# EAGLE board EasyDriver_GiantPanel_v45 (EAGLE 6.6.0), part 1 of 6
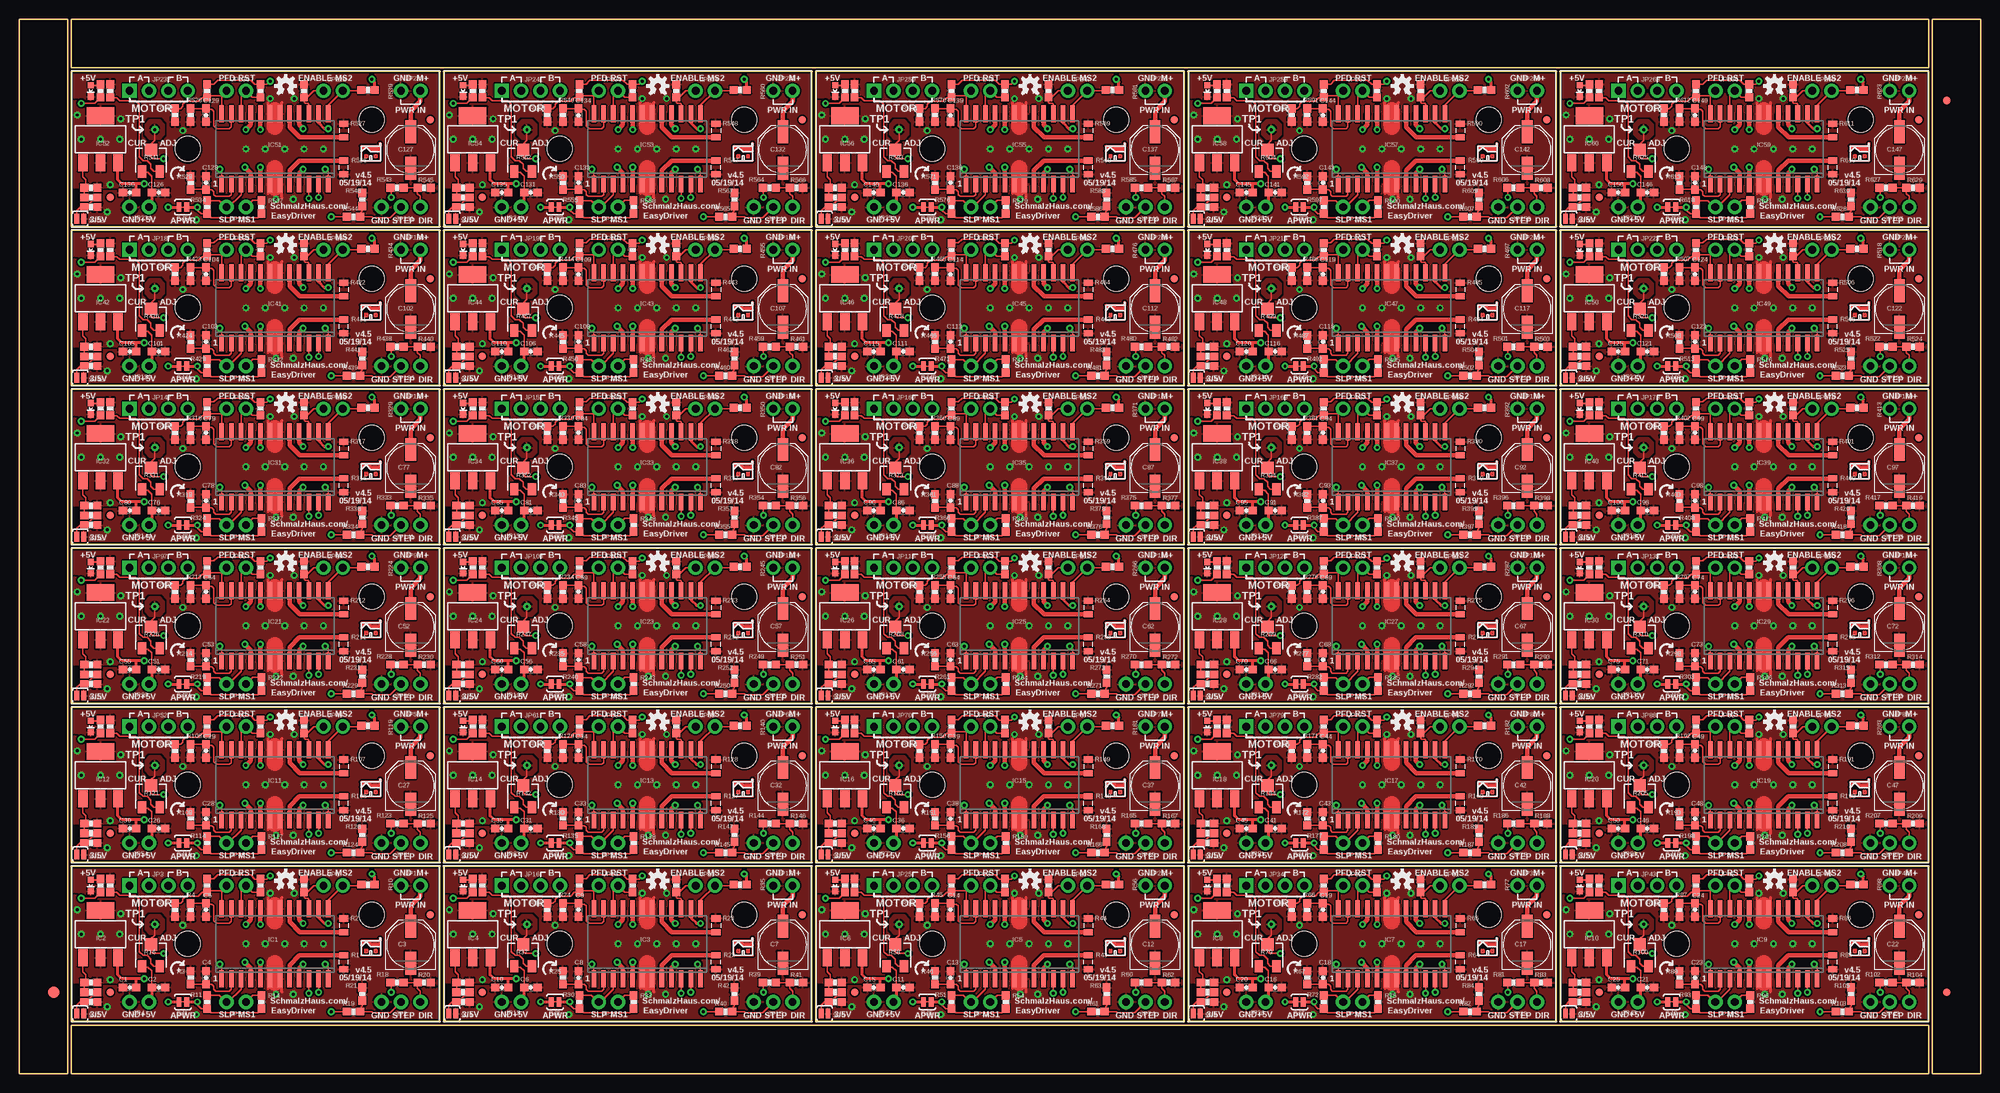
[diagram p0: board, top side]
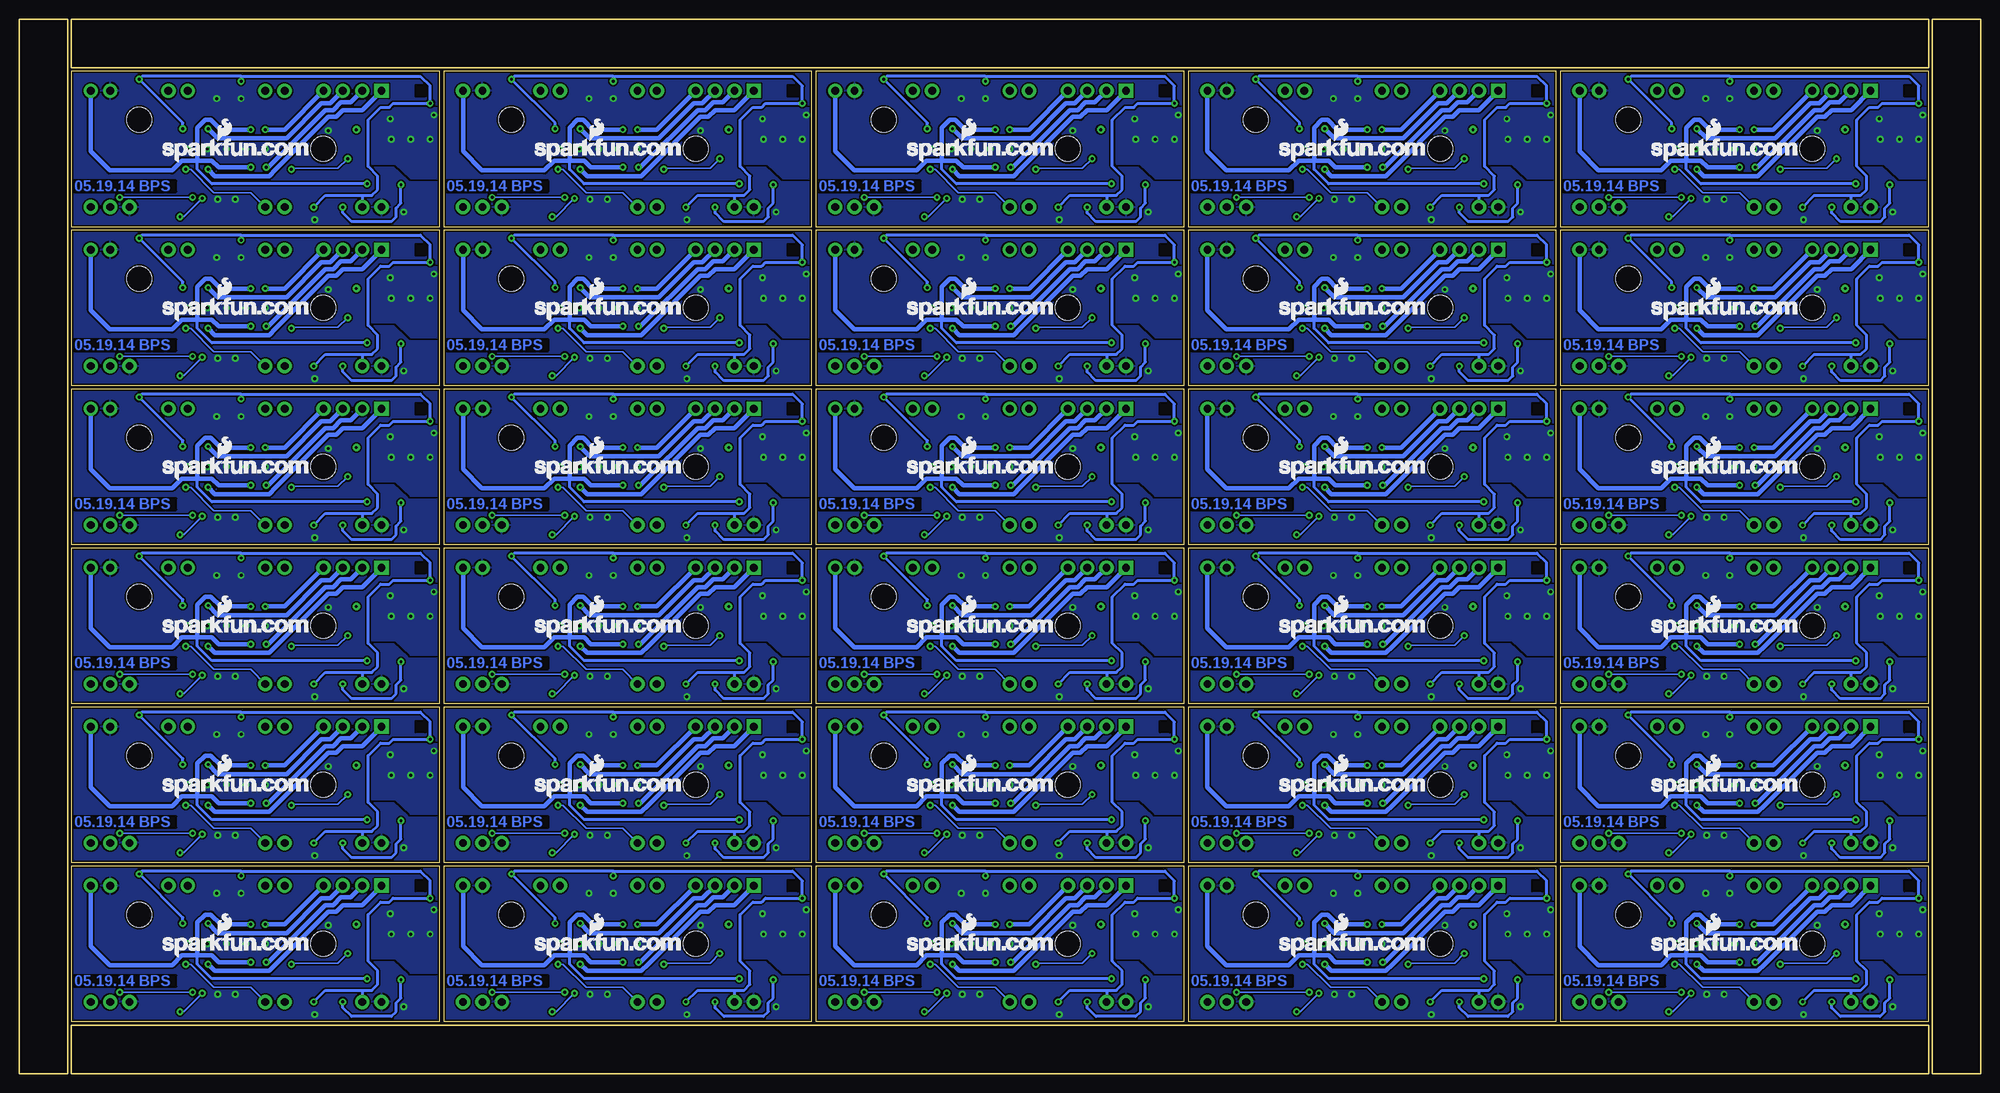
[diagram p1: board, bottom side, seen from below]

Size 257.05 x 138.18 mm. Coordinates in mm from the lower left corner, seen from the top.
Outline: 6.86,6.86 6.86,27.18 55.12,27.18 55.12,6.86 6.86,6.86
Outline: 55.63,6.86 55.63,27.18 103.89,27.18 103.89,6.86 55.63,6.86
Outline: 104.39,6.86 104.39,27.18 152.65,27.18 152.65,6.86 104.39,6.86
Outline: 153.16,6.86 153.16,27.18 201.42,27.18 201.42,6.86 153.16,6.86
Outline: 201.93,6.86 201.93,27.18 250.19,27.18 250.19,6.86 201.93,6.86
Outline: 6.86,27.69 6.86,48.01 55.12,48.01 55.12,27.69 6.86,27.69
Outline: 55.63,27.69 55.63,48.01 103.89,48.01 103.89,27.69 55.63,27.69
Outline: 104.39,27.69 104.39,48.01 152.65,48.01 152.65,27.69 104.39,27.69
Outline: 153.16,27.69 153.16,48.01 201.42,48.01 201.42,27.69 153.16,27.69
Outline: 201.93,27.69 201.93,48.01 250.19,48.01 250.19,27.69 201.93,27.69
Outline: 6.86,48.51 6.86,68.83 55.12,68.83 55.12,48.51 6.86,48.51
Outline: 55.63,48.51 55.63,68.83 103.89,68.83 103.89,48.51 55.63,48.51
Outline: 104.39,48.51 104.39,68.83 152.65,68.83 152.65,48.51 104.39,48.51
Outline: 153.16,48.51 153.16,68.83 201.42,68.83 201.42,48.51 153.16,48.51
Outline: 201.93,48.51 201.93,68.83 250.19,68.83 250.19,48.51 201.93,48.51
Outline: 6.86,69.34 6.86,89.66 55.12,89.66 55.12,69.34 6.86,69.34
Outline: 55.63,69.34 55.63,89.66 103.89,89.66 103.89,69.34 55.63,69.34
Outline: 104.39,69.34 104.39,89.66 152.65,89.66 152.65,69.34 104.39,69.34
Outline: 153.16,69.34 153.16,89.66 201.42,89.66 201.42,69.34 153.16,69.34
Outline: 201.93,69.34 201.93,89.66 250.19,89.66 250.19,69.34 201.93,69.34
Outline: 6.86,90.17 6.86,110.49 55.12,110.49 55.12,90.17 6.86,90.17
Outline: 55.63,90.17 55.63,110.49 103.89,110.49 103.89,90.17 55.63,90.17
Outline: 104.39,90.17 104.39,110.49 152.65,110.49 152.65,90.17 104.39,90.17
Outline: 153.16,90.17 153.16,110.49 201.42,110.49 201.42,90.17 153.16,90.17
Outline: 201.93,90.17 201.93,110.49 250.19,110.49 250.19,90.17 201.93,90.17
Outline: 6.86,111 6.86,131.32 55.12,131.32 55.12,111 6.86,111
Outline: 55.63,111 55.63,131.32 103.89,131.32 103.89,111 55.63,111
Outline: 104.39,111 104.39,131.32 152.65,131.32 152.65,111 104.39,111
Outline: 153.16,111 153.16,131.32 201.42,131.32 201.42,111 153.16,111
Outline: 201.93,111 201.93,131.32 250.19,131.32 250.19,111 201.93,111
Outline: 6.35,0 6.35,138.18 0,138.18 0,0 6.35,0
Outline: 6.86,6.35 6.86,0 250.19,0 250.19,6.35 6.86,6.35
Outline: 257.05,0 257.05,138.18 250.7,138.18 250.7,0 257.05,0
Outline: 250.19,131.83 250.19,138.18 6.86,138.18 6.86,131.83 250.19,131.83
Copper layers (1*16): Top 0.035mm / dielectric 1.5mm / Bottom 0.035mm
Design rules "GoldPhoenix_8and8": minimum track width 7mil, minimum drill 15mil, track to track 8mil, track to pad 8mil, pad to pad 8mil, via to via 8mil, smd to smd 8mil, copper to edge 10mil, drill to drill 8mil, minimum pad ring 12mil, minimum via ring 10mil, stop-mask expansion 4mil, vias tented up to drill 25mil, thermal gap 10mil
bRestrict: area 8.8,23.9 to 10,25.4; area 57.5,23.9 to 58.8,25.4; area 106.3,23.9 to 107.6,25.4; area 155.1,23.9 to 156.3,25.4; area 203.8,23.9 to 205.1,25.4; area 8.8,44.7 to 10,46.2; area 57.5,44.7 to 58.8,46.2; area 106.3,44.7 to 107.6,46.2; area 155.1,44.7 to 156.3,46.2; area 203.8,44.7 to 205.1,46.2; area 8.8,65.5 to 10,67.1; area 57.5,65.5 to 58.8,67.1; area 106.3,65.5 to 107.6,67.1; area 155.1,65.5 to 156.3,67.1; area 203.8,65.5 to 205.1,67.1; area 8.8,86.4 to 10,87.9; area 57.5,86.4 to 58.8,87.9; area 106.3,86.4 to 107.6,87.9; area 155.1,86.4 to 156.3,87.9; area 203.8,86.4 to 205.1,87.9; area 8.8,107.2 to 10,108.7; area 57.5,107.2 to 58.8,108.7; area 106.3,107.2 to 107.6,108.7; area 155.1,107.2 to 156.3,108.7; area 203.8,107.2 to 205.1,108.7; area 8.8,128 to 10,129.5; area 57.5,128 to 58.8,129.5; area 106.3,128 to 107.6,129.5; area 155.1,128 to 156.3,129.5; area 203.8,128 to 205.1,129.5

## Footprints (pad centres in the part's own frame; a part is rotated, then mirrored left to right if it is on the bottom)
0603-CAP = smd 1.1 x 1: 1 -0.85,0; 2 0.85,0
PANASONIC_D = smd 3 x 1.4: + 2.4,0; - -2.4,0
FIDUCIAL-1.5X3 = smd 1.5 x 1.5: 1 0,0
FIDUCIAL-1X2 = smd 1 x 1: 1 0,0
SO24W = smd 0.6 x 2.2: 1 -6.985,-4.6; 2 -5.715,-4.6; 3 -4.445,-4.6; 4 -3.175,-4.6; 5 -1.905,-4.6; 6 -0.635,-4.6; 7 0.635,-4.6; 8 1.905,-4.6; 9 3.175,-4.6; 10 4.445,-4.6; 11 5.715,-4.6; 12 6.985,-4.6; 13 6.985,4.6; 14 5.715,4.6; 15 4.445,4.6; 16 3.175,4.6; 17 1.905,4.6; 18 0.635,4.6; 19 -0.635,4.6; 20 -1.905,4.6; 21 -3.175,4.6; 22 -4.445,4.6; 23 -5.715,4.6; 24 -6.985,4.6
SOT223 = smd 1.219 x 2.235: 1 -2.311,-3.099; 2 0,-3.099; 3 2.311,-3.099 | smd 3.6 x 2.2: 4 0,3.099
1X02_NO_SILK = drill 1.016 pad 1.88: 1 0,0; 2 2.54,0
1X03_NO_SILK = drill 1.016 pad 1.88: 1 0,0; 2 2.54,0; 3 5.08,0
1X04_NO_SILK = drill 1.016 pad 1.88 square: 1 0,0 | drill 1.016 pad 1.88: 2 2.54,0; 3 5.08,0; 4 7.62,0
STAND-OFF = hole 3.302: 0,0
LED-0603 = smd 0.8 x 0.8: A 0,-0.75; C 0,0.75
0805 = smd 0.8 x 1.2: 1 -0.9,0; 2 0.9,0
0603-RES = smd 1.1 x 1: 1 -0.85,0; 2 0.85,0
TRIMPOT-3MM-2 = smd 1.092 x 1.6: 1 -1.155,-1.421; 3 1.155,-1.421 | smd 1.6 x 1.6: 2 0,1.421
SJ_2S-TRACE = smd 0.635 x 1.27: 1 -0.508,0; 2 0.508,0
SJ_2S-NO = smd 0.635 x 1.27: 1 -0.45,0; 2 0.45,0
TP_15TH = drill 0.381 pad 0.61: P$1 0,0

## Placement (x,y rotation side)
C1  .1uF  [0603-CAP]  14.48,11.3 180 top
C2  1uf  [0603-CAP]  18.29,11.3 0 top
C3  47uF  [PANASONIC_D]  51.31,16.89 90 top
C4  680pF  [0603-CAP]  24.51,12.57 90 top
C5  680pF  [0603-CAP]  24.51,21.46 270 top
C6  1uf  [0603-CAP]  67.06,11.3 0 top
C7  47uF  [PANASONIC_D]  100.08,16.89 90 top
C8  680pF  [0603-CAP]  73.28,12.57 90 top
C9  680pF  [0603-CAP]  73.28,21.46 270 top
C10  .1uF  [0603-CAP]  63.25,11.3 180 top
C11  1uf  [0603-CAP]  115.82,11.3 0 top
C12  47uF  [PANASONIC_D]  148.84,16.89 90 top
C13  680pF  [0603-CAP]  122.05,12.57 90 top
C14  680pF  [0603-CAP]  122.05,21.46 270 top
C15  .1uF  [0603-CAP]  112.01,11.3 180 top
C16  1uf  [0603-CAP]  164.59,11.3 0 top
C17  47uF  [PANASONIC_D]  197.61,16.89 90 top
C18  680pF  [0603-CAP]  170.81,12.57 90 top
C19  680pF  [0603-CAP]  170.81,21.46 270 top
C20  .1uF  [0603-CAP]  160.78,11.3 180 top
C21  1uf  [0603-CAP]  213.36,11.3 0 top
C22  47uF  [PANASONIC_D]  246.38,16.89 90 top
C23  680pF  [0603-CAP]  219.58,12.57 90 top
C24  680pF  [0603-CAP]  219.58,21.46 270 top
C25  .1uF  [0603-CAP]  209.55,11.3 180 top
C26  1uf  [0603-CAP]  18.29,32.13 0 top
C27  47uF  [PANASONIC_D]  51.31,37.72 90 top
C28  680pF  [0603-CAP]  24.51,33.4 90 top
C29  680pF  [0603-CAP]  24.51,42.29 270 top
C30  .1uF  [0603-CAP]  14.48,32.13 180 top
C31  1uf  [0603-CAP]  67.06,32.13 0 top
C32  47uF  [PANASONIC_D]  100.08,37.72 90 top
C33  680pF  [0603-CAP]  73.28,33.4 90 top
C34  680pF  [0603-CAP]  73.28,42.29 270 top
C35  .1uF  [0603-CAP]  63.25,32.13 180 top
C36  1uf  [0603-CAP]  115.82,32.13 0 top
C37  47uF  [PANASONIC_D]  148.84,37.72 90 top
C38  680pF  [0603-CAP]  122.05,33.4 90 top
C39  680pF  [0603-CAP]  122.05,42.29 270 top
C40  .1uF  [0603-CAP]  112.01,32.13 180 top
C41  1uf  [0603-CAP]  164.59,32.13 0 top
C42  47uF  [PANASONIC_D]  197.61,37.72 90 top
C43  680pF  [0603-CAP]  170.81,33.4 90 top
C44  680pF  [0603-CAP]  170.81,42.29 270 top
C45  .1uF  [0603-CAP]  160.78,32.13 180 top
C46  1uf  [0603-CAP]  213.36,32.13 0 top
C47  47uF  [PANASONIC_D]  246.38,37.72 90 top
C48  680pF  [0603-CAP]  219.58,33.4 90 top
C49  680pF  [0603-CAP]  219.58,42.29 270 top
C50  .1uF  [0603-CAP]  209.55,32.13 180 top
C51  1uf  [0603-CAP]  18.29,52.96 0 top
C52  47uF  [PANASONIC_D]  51.31,58.55 90 top
C53  680pF  [0603-CAP]  24.51,54.23 90 top
C54  680pF  [0603-CAP]  24.51,63.12 270 top
C55  .1uF  [0603-CAP]  14.48,52.96 180 top
C56  1uf  [0603-CAP]  67.06,52.96 0 top
C57  47uF  [PANASONIC_D]  100.08,58.55 90 top
C58  680pF  [0603-CAP]  73.28,54.23 90 top
C59  680pF  [0603-CAP]  73.28,63.12 270 top
C60  .1uF  [0603-CAP]  63.25,52.96 180 top
C61  1uf  [0603-CAP]  115.82,52.96 0 top
C62  47uF  [PANASONIC_D]  148.84,58.55 90 top
C63  680pF  [0603-CAP]  122.05,54.23 90 top
C64  680pF  [0603-CAP]  122.05,63.12 270 top
C65  .1uF  [0603-CAP]  112.01,52.96 180 top
C66  1uf  [0603-CAP]  164.59,52.96 0 top
C67  47uF  [PANASONIC_D]  197.61,58.55 90 top
C68  680pF  [0603-CAP]  170.81,54.23 90 top
C69  680pF  [0603-CAP]  170.81,63.12 270 top
C70  .1uF  [0603-CAP]  160.78,52.96 180 top
C71  1uf  [0603-CAP]  213.36,52.96 0 top
C72  47uF  [PANASONIC_D]  246.38,58.55 90 top
C73  680pF  [0603-CAP]  219.58,54.23 90 top
C74  680pF  [0603-CAP]  219.58,63.12 270 top
C75  .1uF  [0603-CAP]  209.55,52.96 180 top
C76  1uf  [0603-CAP]  18.29,73.79 0 top
C77  47uF  [PANASONIC_D]  51.31,79.38 90 top
C78  680pF  [0603-CAP]  24.51,75.06 90 top
C79  680pF  [0603-CAP]  24.51,83.95 270 top
C80  .1uF  [0603-CAP]  14.48,73.79 180 top
C81  1uf  [0603-CAP]  67.06,73.79 0 top
C82  47uF  [PANASONIC_D]  100.08,79.38 90 top
C83  680pF  [0603-CAP]  73.28,75.06 90 top
C84  680pF  [0603-CAP]  73.28,83.95 270 top
C85  .1uF  [0603-CAP]  63.25,73.79 180 top
C86  1uf  [0603-CAP]  115.82,73.79 0 top
C87  47uF  [PANASONIC_D]  148.84,79.38 90 top
C88  680pF  [0603-CAP]  122.05,75.06 90 top
C89  680pF  [0603-CAP]  122.05,83.95 270 top
C90  .1uF  [0603-CAP]  112.01,73.79 180 top
C91  1uf  [0603-CAP]  164.59,73.79 0 top
C92  47uF  [PANASONIC_D]  197.61,79.38 90 top
C93  680pF  [0603-CAP]  170.81,75.06 90 top
C94  680pF  [0603-CAP]  170.81,83.95 270 top
C95  .1uF  [0603-CAP]  160.78,73.79 180 top
C96  1uf  [0603-CAP]  213.36,73.79 0 top
C97  47uF  [PANASONIC_D]  246.38,79.38 90 top
C98  680pF  [0603-CAP]  219.58,75.06 90 top
C99  680pF  [0603-CAP]  219.58,83.95 270 top
C100  .1uF  [0603-CAP]  209.55,73.79 180 top
C101  1uf  [0603-CAP]  18.29,94.61 0 top
C102  47uF  [PANASONIC_D]  51.31,100.2 90 top
C103  680pF  [0603-CAP]  24.51,95.89 90 top
C104  680pF  [0603-CAP]  24.51,104.78 270 top
C105  .1uF  [0603-CAP]  14.48,94.61 180 top
C106  1uf  [0603-CAP]  67.06,94.61 0 top
C107  47uF  [PANASONIC_D]  100.08,100.2 90 top
C108  680pF  [0603-CAP]  73.28,95.89 90 top
C109  680pF  [0603-CAP]  73.28,104.78 270 top
C110  .1uF  [0603-CAP]  63.25,94.61 180 top
C111  1uf  [0603-CAP]  115.82,94.61 0 top
C112  47uF  [PANASONIC_D]  148.84,100.2 90 top
C113  680pF  [0603-CAP]  122.05,95.89 90 top
C114  680pF  [0603-CAP]  122.05,104.78 270 top
C115  .1uF  [0603-CAP]  112.01,94.61 180 top
C116  1uf  [0603-CAP]  164.59,94.61 0 top
C117  47uF  [PANASONIC_D]  197.61,100.2 90 top
C118  680pF  [0603-CAP]  170.81,95.89 90 top
C119  680pF  [0603-CAP]  170.81,104.78 270 top
C120  .1uF  [0603-CAP]  160.78,94.61 180 top
C121  1uf  [0603-CAP]  213.36,94.61 0 top
C122  47uF  [PANASONIC_D]  246.38,100.2 90 top
C123  680pF  [0603-CAP]  219.58,95.89 90 top
C124  680pF  [0603-CAP]  219.58,104.78 270 top
C125  .1uF  [0603-CAP]  209.55,94.61 180 top
C126  1uf  [0603-CAP]  18.29,115.44 0 top
C127  47uF  [PANASONIC_D]  51.31,121.03 90 top
C128  680pF  [0603-CAP]  24.51,116.71 90 top
C129  680pF  [0603-CAP]  24.51,125.6 270 top
C130  .1uF  [0603-CAP]  14.48,115.44 180 top
C131  1uf  [0603-CAP]  67.06,115.44 0 top
C132  47uF  [PANASONIC_D]  100.08,121.03 90 top
C133  680pF  [0603-CAP]  73.28,116.71 90 top
C134  680pF  [0603-CAP]  73.28,125.6 270 top
C135  .1uF  [0603-CAP]  63.25,115.44 180 top
C136  1uf  [0603-CAP]  115.82,115.44 0 top
C137  47uF  [PANASONIC_D]  148.84,121.03 90 top
C138  680pF  [0603-CAP]  122.05,116.71 90 top
C139  680pF  [0603-CAP]  122.05,125.6 270 top
C140  .1uF  [0603-CAP]  112.01,115.44 180 top
C141  1uf  [0603-CAP]  164.59,115.44 0 top
C142  47uF  [PANASONIC_D]  197.61,121.03 90 top
C143  680pF  [0603-CAP]  170.81,116.71 90 top
C144  680pF  [0603-CAP]  170.81,125.6 270 top
C145  .1uF  [0603-CAP]  160.78,115.44 180 top
C146  1uf  [0603-CAP]  213.36,115.44 0 top
C147  47uF  [PANASONIC_D]  246.38,121.03 90 top
C148  680pF  [0603-CAP]  219.58,116.71 90 top
C149  680pF  [0603-CAP]  219.58,125.6 270 top
C150  .1uF  [0603-CAP]  209.55,115.44 180 top
E$1  [FIDUCIAL-1.5X3]  4.57,10.67 0 top
E$4  [FIDUCIAL-1X2]  252.6,10.67 0 top
E$6  [FIDUCIAL-1X2]  252.6,127.51 180 top
FID1  FIDUCIAL1X2  [FIDUCIAL-1X2]  53.85,20.83 0 top
FID2  FIDUCIAL1X2  [FIDUCIAL-1X2]  11.94,10.67 0 top
FID3  FIDUCIAL1X2  [FIDUCIAL-1X2]  102.62,20.83 0 top
FID4  FIDUCIAL1X2  [FIDUCIAL-1X2]  60.71,10.67 0 top
FID5  FIDUCIAL1X2  [FIDUCIAL-1X2]  151.38,20.83 0 top
FID6  FIDUCIAL1X2  [FIDUCIAL-1X2]  109.47,10.67 0 top
FID7  FIDUCIAL1X2  [FIDUCIAL-1X2]  200.15,20.83 0 top
FID8  FIDUCIAL1X2  [FIDUCIAL-1X2]  158.24,10.67 0 top
FID9  FIDUCIAL1X2  [FIDUCIAL-1X2]  248.92,20.83 0 top
FID10  FIDUCIAL1X2  [FIDUCIAL-1X2]  207.01,10.67 0 top
FID11  FIDUCIAL1X2  [FIDUCIAL-1X2]  53.85,41.66 0 top
FID12  FIDUCIAL1X2  [FIDUCIAL-1X2]  11.94,31.5 0 top
FID13  FIDUCIAL1X2  [FIDUCIAL-1X2]  102.62,41.66 0 top
FID14  FIDUCIAL1X2  [FIDUCIAL-1X2]  60.71,31.5 0 top
FID15  FIDUCIAL1X2  [FIDUCIAL-1X2]  151.38,41.66 0 top
FID16  FIDUCIAL1X2  [FIDUCIAL-1X2]  109.47,31.5 0 top
FID17  FIDUCIAL1X2  [FIDUCIAL-1X2]  200.15,41.66 0 top
FID18  FIDUCIAL1X2  [FIDUCIAL-1X2]  158.24,31.5 0 top
FID19  FIDUCIAL1X2  [FIDUCIAL-1X2]  248.92,41.66 0 top
FID20  FIDUCIAL1X2  [FIDUCIAL-1X2]  207.01,31.5 0 top
FID21  FIDUCIAL1X2  [FIDUCIAL-1X2]  53.85,62.48 0 top
FID22  FIDUCIAL1X2  [FIDUCIAL-1X2]  11.94,52.32 0 top
FID23  FIDUCIAL1X2  [FIDUCIAL-1X2]  102.62,62.48 0 top
FID24  FIDUCIAL1X2  [FIDUCIAL-1X2]  60.71,52.32 0 top
FID25  FIDUCIAL1X2  [FIDUCIAL-1X2]  151.38,62.48 0 top
FID26  FIDUCIAL1X2  [FIDUCIAL-1X2]  109.47,52.32 0 top
FID27  FIDUCIAL1X2  [FIDUCIAL-1X2]  200.15,62.48 0 top
FID28  FIDUCIAL1X2  [FIDUCIAL-1X2]  158.24,52.32 0 top
FID29  FIDUCIAL1X2  [FIDUCIAL-1X2]  248.92,62.48 0 top
FID30  FIDUCIAL1X2  [FIDUCIAL-1X2]  207.01,52.32 0 top
FID31  FIDUCIAL1X2  [FIDUCIAL-1X2]  53.85,83.31 0 top
FID32  FIDUCIAL1X2  [FIDUCIAL-1X2]  11.94,73.15 0 top
FID33  FIDUCIAL1X2  [FIDUCIAL-1X2]  102.62,83.31 0 top
FID34  FIDUCIAL1X2  [FIDUCIAL-1X2]  60.71,73.15 0 top
FID35  FIDUCIAL1X2  [FIDUCIAL-1X2]  151.38,83.31 0 top
FID36  FIDUCIAL1X2  [FIDUCIAL-1X2]  109.47,73.15 0 top
FID37  FIDUCIAL1X2  [FIDUCIAL-1X2]  200.15,83.31 0 top
FID38  FIDUCIAL1X2  [FIDUCIAL-1X2]  158.24,73.15 0 top
FID39  FIDUCIAL1X2  [FIDUCIAL-1X2]  248.92,83.31 0 top
FID40  FIDUCIAL1X2  [FIDUCIAL-1X2]  207.01,73.15 0 top
FID41  FIDUCIAL1X2  [FIDUCIAL-1X2]  53.85,104.14 0 top
FID42  FIDUCIAL1X2  [FIDUCIAL-1X2]  11.94,93.98 0 top
FID43  FIDUCIAL1X2  [FIDUCIAL-1X2]  102.62,104.14 0 top
FID44  FIDUCIAL1X2  [FIDUCIAL-1X2]  60.71,93.98 0 top
FID45  FIDUCIAL1X2  [FIDUCIAL-1X2]  151.38,104.14 0 top
FID46  FIDUCIAL1X2  [FIDUCIAL-1X2]  109.47,93.98 0 top
FID47  FIDUCIAL1X2  [FIDUCIAL-1X2]  200.15,104.14 0 top
FID48  FIDUCIAL1X2  [FIDUCIAL-1X2]  158.24,93.98 0 top
FID49  FIDUCIAL1X2  [FIDUCIAL-1X2]  248.92,104.14 0 top
FID50  FIDUCIAL1X2  [FIDUCIAL-1X2]  207.01,93.98 0 top
FID51  FIDUCIAL1X2  [FIDUCIAL-1X2]  53.85,124.97 0 top
FID52  FIDUCIAL1X2  [FIDUCIAL-1X2]  11.94,114.81 0 top
FID53  FIDUCIAL1X2  [FIDUCIAL-1X2]  102.62,124.97 0 top
FID54  FIDUCIAL1X2  [FIDUCIAL-1X2]  60.71,114.81 0 top
FID55  FIDUCIAL1X2  [FIDUCIAL-1X2]  151.38,124.97 0 top
FID56  FIDUCIAL1X2  [FIDUCIAL-1X2]  109.47,114.81 0 top
FID57  FIDUCIAL1X2  [FIDUCIAL-1X2]  200.15,124.97 0 top
FID58  FIDUCIAL1X2  [FIDUCIAL-1X2]  158.24,114.81 0 top
FID59  FIDUCIAL1X2  [FIDUCIAL-1X2]  248.92,124.97 0 top
FID60  FIDUCIAL1X2  [FIDUCIAL-1X2]  207.01,114.81 0 top
IC1  A3967SLB  [SO24W]  33.53,17.02 0 top
IC2  V_REG_317SMD  [SOT223]  10.67,18.29 0 top
IC3  A3967SLB  [SO24W]  82.3,17.02 0 top
IC4  V_REG_317SMD  [SOT223]  59.44,18.29 0 top
IC5  A3967SLB  [SO24W]  131.06,17.02 0 top
IC6  V_REG_317SMD  [SOT223]  108.2,18.29 0 top
IC7  A3967SLB  [SO24W]  179.83,17.02 0 top
IC8  V_REG_317SMD  [SOT223]  156.97,18.29 0 top
IC9  A3967SLB  [SO24W]  228.6,17.02 0 top
IC10  V_REG_317SMD  [SOT223]  205.74,18.29 0 top
IC11  A3967SLB  [SO24W]  33.53,37.85 0 top
IC12  V_REG_317SMD  [SOT223]  10.67,39.12 0 top
IC13  A3967SLB  [SO24W]  82.3,37.85 0 top
IC14  V_REG_317SMD  [SOT223]  59.44,39.12 0 top
IC15  A3967SLB  [SO24W]  131.06,37.85 0 top
IC16  V_REG_317SMD  [SOT223]  108.2,39.12 0 top
IC17  A3967SLB  [SO24W]  179.83,37.85 0 top
IC18  V_REG_317SMD  [SOT223]  156.97,39.12 0 top
IC19  A3967SLB  [SO24W]  228.6,37.85 0 top
IC20  V_REG_317SMD  [SOT223]  205.74,39.12 0 top
IC21  A3967SLB  [SO24W]  33.53,58.67 0 top
IC22  V_REG_317SMD  [SOT223]  10.67,59.94 0 top
IC23  A3967SLB  [SO24W]  82.3,58.67 0 top
IC24  V_REG_317SMD  [SOT223]  59.44,59.94 0 top
IC25  A3967SLB  [SO24W]  131.06,58.67 0 top
IC26  V_REG_317SMD  [SOT223]  108.2,59.94 0 top
IC27  A3967SLB  [SO24W]  179.83,58.67 0 top
IC28  V_REG_317SMD  [SOT223]  156.97,59.94 0 top
IC29  A3967SLB  [SO24W]  228.6,58.67 0 top
IC30  V_REG_317SMD  [SOT223]  205.74,59.94 0 top
IC31  A3967SLB  [SO24W]  33.53,79.5 0 top
IC32  V_REG_317SMD  [SOT223]  10.67,80.77 0 top
IC33  A3967SLB  [SO24W]  82.3,79.5 0 top
IC34  V_REG_317SMD  [SOT223]  59.44,80.77 0 top
IC35  A3967SLB  [SO24W]  131.06,79.5 0 top
IC36  V_REG_317SMD  [SOT223]  108.2,80.77 0 top
IC37  A3967SLB  [SO24W]  179.83,79.5 0 top
IC38  V_REG_317SMD  [SOT223]  156.97,80.77 0 top
IC39  A3967SLB  [SO24W]  228.6,79.5 0 top
IC40  V_REG_317SMD  [SOT223]  205.74,80.77 0 top
IC41  A3967SLB  [SO24W]  33.53,100.33 0 top
IC42  V_REG_317SMD  [SOT223]  10.67,101.6 0 top
IC43  A3967SLB  [SO24W]  82.3,100.33 0 top
IC44  V_REG_317SMD  [SOT223]  59.44,101.6 0 top
IC45  A3967SLB  [SO24W]  131.06,100.33 0 top
IC46  V_REG_317SMD  [SOT223]  108.2,101.6 0 top
IC47  A3967SLB  [SO24W]  179.83,100.33 0 top
IC48  V_REG_317SMD  [SOT223]  156.97,101.6 0 top
IC49  A3967SLB  [SO24W]  228.6,100.33 0 top
IC50  V_REG_317SMD  [SOT223]  205.74,101.6 0 top
IC51  A3967SLB  [SO24W]  33.53,121.16 0 top
IC52  V_REG_317SMD  [SOT223]  10.67,122.43 0 top
IC53  A3967SLB  [SO24W]  82.3,121.16 0 top
IC54  V_REG_317SMD  [SOT223]  59.44,122.43 0 top
IC55  A3967SLB  [SO24W]  131.06,121.16 0 top
IC56  V_REG_317SMD  [SOT223]  108.2,122.43 0 top
IC57  A3967SLB  [SO24W]  179.83,121.16 0 top
IC58  V_REG_317SMD  [SOT223]  156.97,122.43 0 top
IC59  A3967SLB  [SO24W]  228.6,121.16 0 top
IC60  V_REG_317SMD  [SOT223]  205.74,122.43 0 top
JP1  [1X02_NO_SILK]  50.04,24.64 0 top
JP2  [1X03_NO_SILK]  47.5,9.4 0 top
JP3  [1X04_NO_SILK]  14.48,24.64 0 top
JP4  [1X02_NO_SILK]  17.02,9.4 180 top
JP5  [1X02_NO_SILK]  29.72,9.4 180 top
JP6  [1X02_NO_SILK]  39.88,24.64 0 top
JP7  [1X02_NO_SILK]  27.18,24.64 0 top
JP8  STAND-OFF  [STAND-OFF]  46.23,20.83 0 top
JP9  STAND-OFF  [STAND-OFF]  22.1,17.02 0 top
JP10  STAND-OFF  [STAND-OFF]  95,20.83 0 top
JP11  STAND-OFF  [STAND-OFF]  70.87,17.02 0 top
JP12  [1X02_NO_SILK]  78.49,9.4 180 top
JP13  [1X02_NO_SILK]  88.65,24.64 0 top
JP14  [1X02_NO_SILK]  75.95,24.64 0 top
JP15  [1X03_NO_SILK]  96.27,9.4 0 top
JP16  [1X04_NO_SILK]  63.25,24.64 0 top
JP17  [1X02_NO_SILK]  98.81,24.64 0 top
JP18  [1X02_NO_SILK]  65.79,9.4 180 top
JP19  STAND-OFF  [STAND-OFF]  143.76,20.83 0 top
JP20  STAND-OFF  [STAND-OFF]  119.63,17.02 0 top
JP21  [1X02_NO_SILK]  127.25,9.4 180 top
JP22  [1X02_NO_SILK]  137.41,24.64 0 top
JP23  [1X02_NO_SILK]  124.71,24.64 0 top
JP24  [1X03_NO_SILK]  145.03,9.4 0 top
JP25  [1X04_NO_SILK]  112.01,24.64 0 top
JP26  [1X02_NO_SILK]  147.57,24.64 0 top
JP27  [1X02_NO_SILK]  114.55,9.4 180 top
JP28  STAND-OFF  [STAND-OFF]  192.53,20.83 0 top
JP29  STAND-OFF  [STAND-OFF]  168.4,17.02 0 top
JP30  [1X02_NO_SILK]  176.02,9.4 180 top
JP31  [1X02_NO_SILK]  186.18,24.64 0 top
JP32  [1X02_NO_SILK]  173.48,24.64 0 top
JP33  [1X03_NO_SILK]  193.8,9.4 0 top
JP34  [1X04_NO_SILK]  160.78,24.64 0 top
JP35  [1X02_NO_SILK]  196.34,24.64 0 top
JP36  [1X02_NO_SILK]  163.32,9.4 180 top
JP37  STAND-OFF  [STAND-OFF]  241.3,20.83 0 top
JP38  STAND-OFF  [STAND-OFF]  217.17,17.02 0 top
JP39  [1X02_NO_SILK]  224.79,9.4 180 top
JP40  [1X02_NO_SILK]  234.95,24.64 0 top
JP41  [1X02_NO_SILK]  222.25,24.64 0 top
JP42  [1X03_NO_SILK]  242.57,9.4 0 top
JP43  [1X04_NO_SILK]  209.55,24.64 0 top
JP44  [1X02_NO_SILK]  245.11,24.64 0 top
JP45  [1X02_NO_SILK]  212.09,9.4 180 top
JP46  STAND-OFF  [STAND-OFF]  46.23,41.66 0 top
JP47  STAND-OFF  [STAND-OFF]  22.1,37.85 0 top
JP48  [1X02_NO_SILK]  29.72,30.23 180 top
JP49  [1X02_NO_SILK]  39.88,45.47 0 top
JP50  [1X02_NO_SILK]  27.18,45.47 0 top
JP51  [1X03_NO_SILK]  47.5,30.23 0 top
JP52  [1X04_NO_SILK]  14.48,45.47 0 top
JP53  [1X02_NO_SILK]  50.04,45.47 0 top
JP54  [1X02_NO_SILK]  17.02,30.23 180 top
JP55  STAND-OFF  [STAND-OFF]  95,41.66 0 top
JP56  STAND-OFF  [STAND-OFF]  70.87,37.85 0 top
JP57  [1X02_NO_SILK]  78.49,30.23 180 top
JP58  [1X02_NO_SILK]  88.65,45.47 0 top
JP59  [1X02_NO_SILK]  75.95,45.47 0 top
JP60  [1X03_NO_SILK]  96.27,30.23 0 top
JP61  [1X04_NO_SILK]  63.25,45.47 0 top
JP62  [1X02_NO_SILK]  98.81,45.47 0 top
JP63  [1X02_NO_SILK]  65.79,30.23 180 top
JP64  STAND-OFF  [STAND-OFF]  143.76,41.66 0 top
JP65  STAND-OFF  [STAND-OFF]  119.63,37.85 0 top
JP66  [1X02_NO_SILK]  127.25,30.23 180 top
JP67  [1X02_NO_SILK]  137.41,45.47 0 top
JP68  [1X02_NO_SILK]  124.71,45.47 0 top
JP69  [1X03_NO_SILK]  145.03,30.23 0 top
JP70  [1X04_NO_SILK]  112.01,45.47 0 top
JP71  [1X02_NO_SILK]  147.57,45.47 0 top
JP72  [1X02_NO_SILK]  114.55,30.23 180 top
JP73  STAND-OFF  [STAND-OFF]  192.53,41.66 0 top
JP74  STAND-OFF  [STAND-OFF]  168.4,37.85 0 top
JP75  [1X02_NO_SILK]  176.02,30.23 180 top
JP76  [1X02_NO_SILK]  186.18,45.47 0 top
JP77  [1X02_NO_SILK]  173.48,45.47 0 top
JP78  [1X03_NO_SILK]  193.8,30.23 0 top
JP79  [1X04_NO_SILK]  160.78,45.47 0 top
JP80  [1X02_NO_SILK]  196.34,45.47 0 top
JP81  [1X02_NO_SILK]  163.32,30.23 180 top
JP82  STAND-OFF  [STAND-OFF]  241.3,41.66 0 top
JP83  STAND-OFF  [STAND-OFF]  217.17,37.85 0 top
JP84  [1X02_NO_SILK]  224.79,30.23 180 top
JP85  [1X02_NO_SILK]  234.95,45.47 0 top
JP86  [1X02_NO_SILK]  222.25,45.47 0 top
JP87  [1X03_NO_SILK]  242.57,30.23 0 top
JP88  [1X04_NO_SILK]  209.55,45.47 0 top
JP89  [1X02_NO_SILK]  245.11,45.47 0 top
JP90  [1X02_NO_SILK]  212.09,30.23 180 top
JP91  STAND-OFF  [STAND-OFF]  46.23,62.48 0 top
JP92  STAND-OFF  [STAND-OFF]  22.1,58.67 0 top
JP93  [1X02_NO_SILK]  29.72,51.05 180 top
JP94  [1X02_NO_SILK]  39.88,66.29 0 top
JP95  [1X02_NO_SILK]  27.18,66.29 0 top
JP96  [1X03_NO_SILK]  47.5,51.05 0 top
JP97  [1X04_NO_SILK]  14.48,66.29 0 top
JP98  [1X02_NO_SILK]  50.04,66.29 0 top
JP99  [1X02_NO_SILK]  17.02,51.05 180 top
JP100  STAND-OFF  [STAND-OFF]  95,62.48 0 top
JP101  STAND-OFF  [STAND-OFF]  70.87,58.67 0 top
JP102  [1X02_NO_SILK]  78.49,51.05 180 top
JP103  [1X02_NO_SILK]  88.65,66.29 0 top
JP104  [1X02_NO_SILK]  75.95,66.29 0 top
JP105  [1X03_NO_SILK]  96.27,51.05 0 top
JP106  [1X04_NO_SILK]  63.25,66.29 0 top
JP107  [1X02_NO_SILK]  98.81,66.29 0 top
JP108  [1X02_NO_SILK]  65.79,51.05 180 top
JP109  STAND-OFF  [STAND-OFF]  143.76,62.48 0 top
JP110  STAND-OFF  [STAND-OFF]  119.63,58.67 0 top
JP111  [1X02_NO_SILK]  127.25,51.05 180 top
JP112  [1X02_NO_SILK]  137.41,66.29 0 top
JP113  [1X02_NO_SILK]  124.71,66.29 0 top
JP114  [1X03_NO_SILK]  145.03,51.05 0 top
JP115  [1X04_NO_SILK]  112.01,66.29 0 top
JP116  [1X02_NO_SILK]  147.57,66.29 0 top
JP117  [1X02_NO_SILK]  114.55,51.05 180 top
JP118  STAND-OFF  [STAND-OFF]  192.53,62.48 0 top
JP119  STAND-OFF  [STAND-OFF]  168.4,58.67 0 top
JP120  [1X02_NO_SILK]  176.02,51.05 180 top
JP121  [1X02_NO_SILK]  186.18,66.29 0 top
JP122  [1X02_NO_SILK]  173.48,66.29 0 top
JP123  [1X03_NO_SILK]  193.8,51.05 0 top
JP124  [1X04_NO_SILK]  160.78,66.29 0 top
JP125  [1X02_NO_SILK]  196.34,66.29 0 top
JP126  [1X02_NO_SILK]  163.32,51.05 180 top
JP127  STAND-OFF  [STAND-OFF]  241.3,62.48 0 top
JP128  STAND-OFF  [STAND-OFF]  217.17,58.67 0 top
JP129  [1X02_NO_SILK]  224.79,51.05 180 top
JP130  [1X02_NO_SILK]  234.95,66.29 0 top
JP131  [1X02_NO_SILK]  222.25,66.29 0 top
JP132  [1X03_NO_SILK]  242.57,51.05 0 top
JP133  [1X04_NO_SILK]  209.55,66.29 0 top
JP134  [1X02_NO_SILK]  245.11,66.29 0 top
JP135  [1X02_NO_SILK]  212.09,51.05 180 top
JP136  STAND-OFF  [STAND-OFF]  46.23,83.31 0 top
JP137  STAND-OFF  [STAND-OFF]  22.1,79.5 0 top
JP138  [1X02_NO_SILK]  29.72,71.88 180 top
JP139  [1X02_NO_SILK]  39.88,87.12 0 top
JP140  [1X02_NO_SILK]  27.18,87.12 0 top
JP141  [1X03_NO_SILK]  47.5,71.88 0 top
JP142  [1X04_NO_SILK]  14.48,87.12 0 top
JP143  [1X02_NO_SILK]  50.04,87.12 0 top
JP144  [1X02_NO_SILK]  17.02,71.88 180 top
JP145  STAND-OFF  [STAND-OFF]  95,83.31 0 top
JP146  STAND-OFF  [STAND-OFF]  70.87,79.5 0 top
JP147  [1X02_NO_SILK]  78.49,71.88 180 top
JP148  [1X02_NO_SILK]  88.65,87.12 0 top
JP149  [1X02_NO_SILK]  75.95,87.12 0 top
JP150  [1X03_NO_SILK]  96.27,71.88 0 top
JP151  [1X04_NO_SILK]  63.25,87.12 0 top
JP152  [1X02_NO_SILK]  98.81,87.12 0 top
JP153  [1X02_NO_SILK]  65.79,71.88 180 top
JP154  STAND-OFF  [STAND-OFF]  143.76,83.31 0 top
JP155  STAND-OFF  [STAND-OFF]  119.63,79.5 0 top
JP156  [1X02_NO_SILK]  127.25,71.88 180 top
JP157  [1X02_NO_SILK]  137.41,87.12 0 top
JP158  [1X02_NO_SILK]  124.71,87.12 0 top
JP159  [1X03_NO_SILK]  145.03,71.88 0 top
JP160  [1X04_NO_SILK]  112.01,87.12 0 top
JP161  [1X02_NO_SILK]  147.57,87.12 0 top
JP162  [1X02_NO_SILK]  114.55,71.88 180 top
JP163  STAND-OFF  [STAND-OFF]  192.53,83.31 0 top
JP164  STAND-OFF  [STAND-OFF]  168.4,79.5 0 top
JP165  [1X02_NO_SILK]  176.02,71.88 180 top
JP166  [1X02_NO_SILK]  186.18,87.12 0 top
JP167  [1X02_NO_SILK]  173.48,87.12 0 top
JP168  [1X03_NO_SILK]  193.8,71.88 0 top
JP169  [1X04_NO_SILK]  160.78,87.12 0 top
JP170  [1X02_NO_SILK]  196.34,87.12 0 top
JP171  [1X02_NO_SILK]  163.32,71.88 180 top
JP172  STAND-OFF  [STAND-OFF]  241.3,83.31 0 top
JP173  STAND-OFF  [STAND-OFF]  217.17,79.5 0 top
JP174  [1X02_NO_SILK]  224.79,71.88 180 top
JP175  [1X02_NO_SILK]  234.95,87.12 0 top
JP176  [1X02_NO_SILK]  222.25,87.12 0 top
JP177  [1X03_NO_SILK]  242.57,71.88 0 top
JP178  [1X04_NO_SILK]  209.55,87.12 0 top
JP179  [1X02_NO_SILK]  245.11,87.12 0 top
JP180  [1X02_NO_SILK]  212.09,71.88 180 top
JP181  STAND-OFF  [STAND-OFF]  46.23,104.14 0 top
JP182  STAND-OFF  [STAND-OFF]  22.1,100.33 0 top
JP183  [1X02_NO_SILK]  29.72,92.71 180 top
JP184  [1X02_NO_SILK]  39.88,107.95 0 top
JP185  [1X02_NO_SILK]  27.18,107.95 0 top
JP186  [1X03_NO_SILK]  47.5,92.71 0 top
JP187  [1X04_NO_SILK]  14.48,107.95 0 top
JP188  [1X02_NO_SILK]  50.04,107.95 0 top
JP189  [1X02_NO_SILK]  17.02,92.71 180 top
JP190  STAND-OFF  [STAND-OFF]  95,104.14 0 top
JP191  STAND-OFF  [STAND-OFF]  70.87,100.33 0 top
JP192  [1X02_NO_SILK]  78.49,92.71 180 top
JP193  [1X02_NO_SILK]  88.65,107.95 0 top
JP194  [1X02_NO_SILK]  75.95,107.95 0 top
JP195  [1X03_NO_SILK]  96.27,92.71 0 top
JP196  [1X04_NO_SILK]  63.25,107.95 0 top
JP197  [1X02_NO_SILK]  98.81,107.95 0 top
JP198  [1X02_NO_SILK]  65.79,92.71 180 top
JP199  STAND-OFF  [STAND-OFF]  143.76,104.14 0 top
JP200  STAND-OFF  [STAND-OFF]  119.63,100.33 0 top
JP201  [1X02_NO_SILK]  127.25,92.71 180 top
JP202  [1X02_NO_SILK]  137.41,107.95 0 top
JP203  [1X02_NO_SILK]  124.71,107.95 0 top
JP204  [1X03_NO_SILK]  145.03,92.71 0 top
JP205  [1X04_NO_SILK]  112.01,107.95 0 top
JP206  [1X02_NO_SILK]  147.57,107.95 0 top
JP207  [1X02_NO_SILK]  114.55,92.71 180 top
JP208  STAND-OFF  [STAND-OFF]  192.53,104.14 0 top
JP209  STAND-OFF  [STAND-OFF]  168.4,100.33 0 top
JP210  [1X02_NO_SILK]  176.02,92.71 180 top
JP211  [1X02_NO_SILK]  186.18,107.95 0 top
JP212  [1X02_NO_SILK]  173.48,107.95 0 top
JP213  [1X03_NO_SILK]  193.8,92.71 0 top
JP214  [1X04_NO_SILK]  160.78,107.95 0 top
JP215  [1X02_NO_SILK]  196.34,107.95 0 top
JP216  [1X02_NO_SILK]  163.32,92.71 180 top
JP217  STAND-OFF  [STAND-OFF]  241.3,104.14 0 top
JP218  STAND-OFF  [STAND-OFF]  217.17,100.33 0 top
JP219  [1X02_NO_SILK]  224.79,92.71 180 top
JP220  [1X02_NO_SILK]  234.95,107.95 0 top
JP221  [1X02_NO_SILK]  222.25,107.95 0 top
JP222  [1X03_NO_SILK]  242.57,92.71 0 top
JP223  [1X04_NO_SILK]  209.55,107.95 0 top
JP224  [1X02_NO_SILK]  245.11,107.95 0 top
JP225  [1X02_NO_SILK]  212.09,92.71 180 top
JP226  STAND-OFF  [STAND-OFF]  46.23,124.97 0 top
JP227  STAND-OFF  [STAND-OFF]  22.1,121.16 0 top
JP228  [1X02_NO_SILK]  29.72,113.54 180 top
JP229  [1X02_NO_SILK]  39.88,128.78 0 top
JP230  [1X02_NO_SILK]  27.18,128.78 0 top
JP231  [1X03_NO_SILK]  47.5,113.54 0 top
JP232  [1X04_NO_SILK]  14.48,128.78 0 top
JP233  [1X02_NO_SILK]  50.04,128.78 0 top
JP234  [1X02_NO_SILK]  17.02,113.54 180 top
JP235  STAND-OFF  [STAND-OFF]  95,124.97 0 top
JP236  STAND-OFF  [STAND-OFF]  70.87,121.16 0 top
JP237  [1X02_NO_SILK]  78.49,113.54 180 top
JP238  [1X02_NO_SILK]  88.65,128.78 0 top
JP239  [1X02_NO_SILK]  75.95,128.78 0 top
JP240  [1X03_NO_SILK]  96.27,113.54 0 top
JP241  [1X04_NO_SILK]  63.25,128.78 0 top
JP242  [1X02_NO_SILK]  98.81,128.78 0 top
JP243  [1X02_NO_SILK]  65.79,113.54 180 top
JP244  STAND-OFF  [STAND-OFF]  143.76,124.97 0 top
JP245  STAND-OFF  [STAND-OFF]  119.63,121.16 0 top
JP246  [1X02_NO_SILK]  127.25,113.54 180 top
JP247  [1X02_NO_SILK]  137.41,128.78 0 top
JP248  [1X02_NO_SILK]  124.71,128.78 0 top
JP249  [1X03_NO_SILK]  145.03,113.54 0 top
JP250  [1X04_NO_SILK]  112.01,128.78 0 top
JP251  [1X02_NO_SILK]  147.57,128.78 0 top
JP252  [1X02_NO_SILK]  114.55,113.54 180 top
JP253  STAND-OFF  [STAND-OFF]  192.53,124.97 0 top
JP254  STAND-OFF  [STAND-OFF]  168.4,121.16 0 top
JP255  [1X02_NO_SILK]  176.02,113.54 180 top
JP256  [1X02_NO_SILK]  186.18,128.78 0 top
JP257  [1X02_NO_SILK]  173.48,128.78 0 top
JP258  [1X03_NO_SILK]  193.8,113.54 0 top
JP259  [1X04_NO_SILK]  160.78,128.78 0 top
JP260  [1X02_NO_SILK]  196.34,128.78 0 top
JP261  [1X02_NO_SILK]  163.32,113.54 180 top
JP262  STAND-OFF  [STAND-OFF]  241.3,124.97 0 top
JP263  STAND-OFF  [STAND-OFF]  217.17,121.16 0 top
JP264  [1X02_NO_SILK]  224.79,113.54 180 top
JP265  [1X02_NO_SILK]  234.95,128.78 0 top
JP266  [1X02_NO_SILK]  222.25,128.78 0 top
JP267  [1X03_NO_SILK]  242.57,113.54 0 top
JP268  [1X04_NO_SILK]  209.55,128.78 0 top
JP269  [1X02_NO_SILK]  245.11,128.78 0 top
JP270  [1X02_NO_SILK]  212.09,113.54 180 top
LOGO1  OSHW-LOGOS  [OSHW-LOGO-S]  34.92,25.27 0 top
LOGO2  OSHW-LOGOS  [OSHW-LOGO-S]  83.69,25.27 0 top
LOGO3  OSHW-LOGOS  [OSHW-LOGO-S]  132.46,25.27 0 top
LOGO4  OSHW-LOGOS  [OSHW-LOGO-S]  181.23,25.27 0 top
LOGO5  OSHW-LOGOS  [OSHW-LOGO-S]  230,25.27 0 top
LOGO6  OSHW-LOGOS  [OSHW-LOGO-S]  34.92,46.1 0 top
LOGO7  OSHW-LOGOS  [OSHW-LOGO-S]  83.69,46.1 0 top
LOGO8  OSHW-LOGOS  [OSHW-LOGO-S]  132.46,46.1 0 top
LOGO9  OSHW-LOGOS  [OSHW-LOGO-S]  181.23,46.1 0 top
LOGO10  OSHW-LOGOS  [OSHW-LOGO-S]  230,46.1 0 top
LOGO11  OSHW-LOGOS  [OSHW-LOGO-S]  34.92,66.93 0 top
LOGO12  OSHW-LOGOS  [OSHW-LOGO-S]  83.69,66.93 0 top
LOGO13  OSHW-LOGOS  [OSHW-LOGO-S]  132.46,66.93 0 top
LOGO14  OSHW-LOGOS  [OSHW-LOGO-S]  181.23,66.93 0 top
LOGO15  OSHW-LOGOS  [OSHW-LOGO-S]  230,66.93 0 top
LOGO16  OSHW-LOGOS  [OSHW-LOGO-S]  34.92,87.76 0 top
LOGO17  OSHW-LOGOS  [OSHW-LOGO-S]  83.69,87.76 0 top
LOGO18  OSHW-LOGOS  [OSHW-LOGO-S]  132.46,87.76 0 top
LOGO19  OSHW-LOGOS  [OSHW-LOGO-S]  181.23,87.76 0 top
LOGO20  OSHW-LOGOS  [OSHW-LOGO-S]  230,87.76 0 top
LOGO21  OSHW-LOGOS  [OSHW-LOGO-S]  34.92,108.58 0 top
LOGO22  OSHW-LOGOS  [OSHW-LOGO-S]  83.69,108.58 0 top
LOGO23  OSHW-LOGOS  [OSHW-LOGO-S]  132.46,108.58 0 top
LOGO24  OSHW-LOGOS  [OSHW-LOGO-S]  181.23,108.58 0 top
LOGO25  OSHW-LOGOS  [OSHW-LOGO-S]  230,108.58 0 top
LOGO26  OSHW-LOGOS  [OSHW-LOGO-S]  34.92,129.41 0 top
LOGO27  OSHW-LOGOS  [OSHW-LOGO-S]  83.69,129.41 0 top
LOGO28  OSHW-LOGOS  [OSHW-LOGO-S]  132.46,129.41 0 top
LOGO29  OSHW-LOGOS  [OSHW-LOGO-S]  181.23,129.41 0 top
LOGO30  OSHW-LOGOS  [OSHW-LOGO-S]  230,129.41 0 top
PWR_LED  YELLOW  [LED-0603]  9.4,24.64 180 top
PWR_LED1  YELLOW  [LED-0603]  58.17,24.64 180 top
PWR_LED2  YELLOW  [LED-0603]  106.93,24.64 180 top
PWR_LED3  YELLOW  [LED-0603]  155.7,24.64 180 top
PWR_LED4  YELLOW  [LED-0603]  204.47,24.64 180 top
PWR_LED5  YELLOW  [LED-0603]  9.4,45.47 180 top
PWR_LED6  YELLOW  [LED-0603]  58.17,45.47 180 top
PWR_LED7  YELLOW  [LED-0603]  106.93,45.47 180 top
PWR_LED8  YELLOW  [LED-0603]  155.7,45.47 180 top
PWR_LED9  YELLOW  [LED-0603]  204.47,45.47 180 top
PWR_LED10  YELLOW  [LED-0603]  9.4,66.29 180 top
PWR_LED11  YELLOW  [LED-0603]  58.17,66.29 180 top
PWR_LED12  YELLOW  [LED-0603]  106.93,66.29 180 top
PWR_LED13  YELLOW  [LED-0603]  155.7,66.29 180 top
PWR_LED14  YELLOW  [LED-0603]  204.47,66.29 180 top
PWR_LED15  YELLOW  [LED-0603]  9.4,87.12 180 top
PWR_LED16  YELLOW  [LED-0603]  58.17,87.12 180 top
PWR_LED17  YELLOW  [LED-0603]  106.93,87.12 180 top
PWR_LED18  YELLOW  [LED-0603]  155.7,87.12 180 top
PWR_LED19  YELLOW  [LED-0603]  204.47,87.12 180 top
PWR_LED20  YELLOW  [LED-0603]  9.4,107.95 180 top
PWR_LED21  YELLOW  [LED-0603]  58.17,107.95 180 top
PWR_LED22  YELLOW  [LED-0603]  106.93,107.95 180 top
PWR_LED23  YELLOW  [LED-0603]  155.7,107.95 180 top
PWR_LED24  YELLOW  [LED-0603]  204.47,107.95 180 top
PWR_LED25  YELLOW  [LED-0603]  9.4,128.78 180 top
PWR_LED26  YELLOW  [LED-0603]  58.17,128.78 180 top
PWR_LED27  YELLOW  [LED-0603]  106.93,128.78 180 top
PWR_LED28  YELLOW  [LED-0603]  155.7,128.78 180 top
PWR_LED29  YELLOW  [LED-0603]  204.47,128.78 180 top
R1  .75  [0805]  42.55,14.61 90 top
R2  .75  [0805]  42.55,19.43 270 top
R3  20K  [0603-RES]  22.48,12.57 270 top
R4  20K  [0603-RES]  22.48,21.46 90 top
R5  2.49K  [0603-RES]  11.94,24.64 270 top
R6  390  [0603-RES]  9.4,10.67 180 top
R7  330  [0603-RES]  9.4,9.4 180 top
R8  240  [0603-RES]  9.4,11.94 0 top
R9  1K  [0603-RES]  10.67,24.64 270 top
R10  10K  [0603-RES]  45.72,24.77 0 top
R11  10K  [0603-RES]  24.64,9.4 270 top
R12  10K  [0603-RES]  24.64,24.64 90 top
R13  10K  [0603-RES]  37.34,24.64 270 top
R14  10K  [0603-RES]  31.75,9.4 270 top
R15  10K  [0603-RES]  31.62,24.64 90 top
R16  10K  [TRIMPOT-3MM-2]  17.27,15.49 0 top
R17  6.8K  [0603-RES]  20.45,21.46 90 top
R18  1K  [0603-RES]  49.53,11.94 0 top
R19  1K  [0603-RES]  43.81,8.13 0 top
R20  10K  [0603-RES]  53.09,11.94 180 top
R21  10K  [0603-RES]  44.96,10.41 270 top
R22  .75  [0805]  91.31,14.61 90 top
R23  .75  [0805]  91.31,19.43 270 top
R24  20K  [0603-RES]  71.25,21.46 90 top
R25  20K  [0603-RES]  71.25,12.57 270 top
R26  2.49K  [0603-RES]  60.71,24.64 270 top
R27  390  [0603-RES]  58.17,10.67 180 top
R28  240  [0603-RES]  58.17,11.94 0 top
R29  1K  [0603-RES]  59.44,24.64 270 top
R30  10K  [0603-RES]  73.41,9.4 270 top
R31  10K  [0603-RES]  73.41,24.64 90 top
R32  10K  [0603-RES]  86.11,24.64 270 top
R33  10K  [0603-RES]  80.52,9.4 270 top
R34  10K  [0603-RES]  80.39,24.64 90 top
R35  10K  [0603-RES]  94.49,24.77 0 top
R36  330  [0603-RES]  58.17,9.4 180 top
R37  10K  [TRIMPOT-3MM-2]  66.04,15.49 0 top
R38  6.8K  [0603-RES]  69.22,21.46 90 top
R39  1K  [0603-RES]  98.3,11.94 0 top
R40  1K  [0603-RES]  92.58,8.13 0 top
R41  10K  [0603-RES]  101.85,11.94 180 top
R42  10K  [0603-RES]  93.73,10.41 270 top
R43  .75  [0805]  140.08,14.61 90 top
R44  .75  [0805]  140.08,19.43 270 top
R45  20K  [0603-RES]  120.02,21.46 90 top
R46  20K  [0603-RES]  120.02,12.57 270 top
R47  2.49K  [0603-RES]  109.47,24.64 270 top
R48  390  [0603-RES]  106.93,10.67 180 top
R49  240  [0603-RES]  106.93,11.94 0 top
R50  1K  [0603-RES]  108.2,24.64 270 top
R51  10K  [0603-RES]  122.17,9.4 270 top
R52  10K  [0603-RES]  122.17,24.64 90 top
R53  10K  [0603-RES]  134.87,24.64 270 top
R54  10K  [0603-RES]  129.29,9.4 270 top
R55  10K  [0603-RES]  129.16,24.64 90 top
R56  10K  [0603-RES]  143.26,24.77 0 top
R57  330  [0603-RES]  106.93,9.4 180 top
R58  10K  [TRIMPOT-3MM-2]  114.81,15.49 0 top
R59  6.8K  [0603-RES]  117.98,21.46 90 top
R60  1K  [0603-RES]  147.07,11.94 0 top
R61  1K  [0603-RES]  141.35,8.13 0 top
R62  10K  [0603-RES]  150.62,11.94 180 top
R63  10K  [0603-RES]  142.49,10.41 270 top
R64  .75  [0805]  188.85,14.61 90 top
R65  .75  [0805]  188.85,19.43 270 top
R66  20K  [0603-RES]  168.78,21.46 90 top
R67  20K  [0603-RES]  168.78,12.57 270 top
R68  2.49K  [0603-RES]  158.24,24.64 270 top
R69  390  [0603-RES]  155.7,10.67 180 top
R70  240  [0603-RES]  155.7,11.94 0 top
R71  1K  [0603-RES]  156.97,24.64 270 top
R72  10K  [0603-RES]  170.94,9.4 270 top
R73  10K  [0603-RES]  170.94,24.64 90 top
R74  10K  [0603-RES]  183.64,24.64 270 top
R75  10K  [0603-RES]  178.05,9.4 270 top
R76  10K  [0603-RES]  177.93,24.64 90 top
R77  10K  [0603-RES]  192.02,24.77 0 top
R78  330  [0603-RES]  155.7,9.4 180 top
R79  10K  [TRIMPOT-3MM-2]  163.58,15.49 0 top
R80  6.8K  [0603-RES]  166.75,21.46 90 top
R81  1K  [0603-RES]  195.83,11.94 0 top
R82  1K  [0603-RES]  190.12,8.13 0 top
R83  10K  [0603-RES]  199.39,11.94 180 top
R84  10K  [0603-RES]  191.26,10.41 270 top
R85  .75  [0805]  237.62,14.61 90 top
R86  .75  [0805]  237.62,19.43 270 top
R87  20K  [0603-RES]  217.55,21.46 90 top
R88  20K  [0603-RES]  217.55,12.57 270 top
R89  2.49K  [0603-RES]  207.01,24.64 270 top
R90  390  [0603-RES]  204.47,10.67 180 top
R91  240  [0603-RES]  204.47,11.94 0 top
R92  1K  [0603-RES]  205.74,24.64 270 top
R93  10K  [0603-RES]  219.71,9.4 270 top
R94  10K  [0603-RES]  219.71,24.64 90 top
R95  10K  [0603-RES]  232.41,24.64 270 top
R96  10K  [0603-RES]  226.82,9.4 270 top
R97  10K  [0603-RES]  226.69,24.64 90 top
R98  10K  [0603-RES]  240.79,24.77 0 top
R99  330  [0603-RES]  204.47,9.4 180 top
R100  10K  [TRIMPOT-3MM-2]  212.34,15.49 0 top
R101  6.8K  [0603-RES]  215.52,21.46 90 top
R102  1K  [0603-RES]  244.6,11.94 0 top
R103  1K  [0603-RES]  238.89,8.13 0 top
R104  10K  [0603-RES]  248.16,11.94 180 top
R105  10K  [0603-RES]  240.03,10.41 270 top
R106  .75  [0805]  42.55,35.43 90 top
R107  .75  [0805]  42.55,40.26 270 top
R108  20K  [0603-RES]  22.48,42.29 90 top
R109  20K  [0603-RES]  22.48,33.4 270 top
R110  2.49K  [0603-RES]  11.94,45.47 270 top
R111  390  [0603-RES]  9.4,31.5 180 top
R112  240  [0603-RES]  9.4,32.77 0 top
R113  1K  [0603-RES]  10.67,45.47 270 top
R114  10K  [0603-RES]  24.64,30.23 270 top
R115  10K  [0603-RES]  24.64,45.47 90 top
R116  10K  [0603-RES]  37.34,45.47 270 top
R117  10K  [0603-RES]  31.75,30.23 270 top
R118  10K  [0603-RES]  31.62,45.47 90 top
R119  10K  [0603-RES]  45.72,45.59 0 top
R120  330  [0603-RES]  9.4,30.23 180 top
R121  10K  [TRIMPOT-3MM-2]  17.27,36.32 0 top
R122  6.8K  [0603-RES]  20.45,42.29 90 top
R123  1K  [0603-RES]  49.53,32.77 0 top
R124  1K  [0603-RES]  43.81,28.96 0 top
R125  10K  [0603-RES]  53.09,32.77 180 top
R126  10K  [0603-RES]  44.96,31.24 270 top
R127  .75  [0805]  91.31,35.43 90 top
R128  .75  [0805]  91.31,40.26 270 top
R129  20K  [0603-RES]  71.25,42.29 90 top
R130  20K  [0603-RES]  71.25,33.4 270 top
R131  2.49K  [0603-RES]  60.71,45.47 270 top
R132  390  [0603-RES]  58.17,31.5 180 top
R133  240  [0603-RES]  58.17,32.77 0 top
R134  1K  [0603-RES]  59.44,45.47 270 top
R135  10K  [0603-RES]  73.41,30.23 270 top
R136  10K  [0603-RES]  73.41,45.47 90 top
R137  10K  [0603-RES]  86.11,45.47 270 top
R138  10K  [0603-RES]  80.52,30.23 270 top
R139  10K  [0603-RES]  80.39,45.47 90 top
R140  10K  [0603-RES]  94.49,45.59 0 top
R141  330  [0603-RES]  58.17,30.23 180 top
R142  10K  [TRIMPOT-3MM-2]  66.04,36.32 0 top
R143  6.8K  [0603-RES]  69.22,42.29 90 top
R144  1K  [0603-RES]  98.3,32.77 0 top
R145  1K  [0603-RES]  92.58,28.96 0 top
R146  10K  [0603-RES]  101.85,32.77 180 top
R147  10K  [0603-RES]  93.73,31.24 270 top
R148  .75  [0805]  140.08,35.43 90 top
R149  .75  [0805]  140.08,40.26 270 top
R150  20K  [0603-RES]  120.02,42.29 90 top
R151  20K  [0603-RES]  120.02,33.4 270 top
R152  2.49K  [0603-RES]  109.47,45.47 270 top
R153  390  [0603-RES]  106.93,31.5 180 top
R154  240  [0603-RES]  106.93,32.77 0 top
R155  1K  [0603-RES]  108.2,45.47 270 top
R156  10K  [0603-RES]  122.17,30.23 270 top
R157  10K  [0603-RES]  122.17,45.47 90 top
R158  10K  [0603-RES]  134.87,45.47 270 top
R159  10K  [0603-RES]  129.29,30.23 270 top
R160  10K  [0603-RES]  129.16,45.47 90 top
R161  10K  [0603-RES]  143.26,45.59 0 top
R162  330  [0603-RES]  106.93,30.23 180 top
R163  10K  [TRIMPOT-3MM-2]  114.81,36.32 0 top
R164  6.8K  [0603-RES]  117.98,42.29 90 top
R165  1K  [0603-RES]  147.07,32.77 0 top
R166  1K  [0603-RES]  141.35,28.96 0 top
R167  10K  [0603-RES]  150.62,32.77 180 top
R168  10K  [0603-RES]  142.49,31.24 270 top
R169  .75  [0805]  188.85,35.43 90 top
R170  .75  [0805]  188.85,40.26 270 top
R171  20K  [0603-RES]  168.78,42.29 90 top
R172  20K  [0603-RES]  168.78,33.4 270 top
R173  2.49K  [0603-RES]  158.24,45.47 270 top
R174  390  [0603-RES]  155.7,31.5 180 top
R175  240  [0603-RES]  155.7,32.77 0 top
R176  1K  [0603-RES]  156.97,45.47 270 top
R177  10K  [0603-RES]  170.94,30.23 270 top
R178  10K  [0603-RES]  170.94,45.47 90 top
R179  10K  [0603-RES]  183.64,45.47 270 top
R180  10K  [0603-RES]  178.05,30.23 270 top
R181  10K  [0603-RES]  177.93,45.47 90 top
R182  10K  [0603-RES]  192.02,45.59 0 top
R183  330  [0603-RES]  155.7,30.23 180 top
R184  10K  [TRIMPOT-3MM-2]  163.58,36.32 0 top
R185  6.8K  [0603-RES]  166.75,42.29 90 top
R186  1K  [0603-RES]  195.83,32.77 0 top
R187  1K  [0603-RES]  190.12,28.96 0 top
R188  10K  [0603-RES]  199.39,32.77 180 top
R189  10K  [0603-RES]  191.26,31.24 270 top
R190  .75  [0805]  237.62,35.43 90 top
R191  .75  [0805]  237.62,40.26 270 top
R192  20K  [0603-RES]  217.55,42.29 90 top
R193  20K  [0603-RES]  217.55,33.4 270 top
R194  2.49K  [0603-RES]  207.01,45.47 270 top
R195  390  [0603-RES]  204.47,31.5 180 top
R196  240  [0603-RES]  204.47,32.77 0 top
R197  1K  [0603-RES]  205.74,45.47 270 top
R198  10K  [0603-RES]  219.71,30.23 270 top
R199  10K  [0603-RES]  219.71,45.47 90 top
R200  10K  [0603-RES]  232.41,45.47 270 top
R201  10K  [0603-RES]  226.82,30.23 270 top
R202  10K  [0603-RES]  226.69,45.47 90 top
R203  10K  [0603-RES]  240.79,45.59 0 top
R204  330  [0603-RES]  204.47,30.23 180 top
R205  10K  [TRIMPOT-3MM-2]  212.34,36.32 0 top
R206  6.8K  [0603-RES]  215.52,42.29 90 top
R207  1K  [0603-RES]  244.6,32.77 0 top
R208  1K  [0603-RES]  238.89,28.96 0 top
R209  10K  [0603-RES]  248.16,32.77 180 top
R210  10K  [0603-RES]  240.03,31.24 270 top
R211  .75  [0805]  42.55,56.26 90 top
R212  .75  [0805]  42.55,61.09 270 top
R213  20K  [0603-RES]  22.48,63.12 90 top
R214  20K  [0603-RES]  22.48,54.23 270 top
R215  2.49K  [0603-RES]  11.94,66.29 270 top
R216  390  [0603-RES]  9.4,52.32 180 top
R217  240  [0603-RES]  9.4,53.59 0 top
R218  1K  [0603-RES]  10.67,66.29 270 top
R219  10K  [0603-RES]  24.64,51.05 270 top
R220  10K  [0603-RES]  24.64,66.29 90 top
R221  10K  [0603-RES]  37.34,66.29 270 top
R222  10K  [0603-RES]  31.75,51.05 270 top
R223  10K  [0603-RES]  31.62,66.29 90 top
R224  10K  [0603-RES]  45.72,66.42 0 top
R225  330  [0603-RES]  9.4,51.05 180 top
R226  10K  [TRIMPOT-3MM-2]  17.27,57.15 0 top
R227  6.8K  [0603-RES]  20.45,63.12 90 top
R228  1K  [0603-RES]  49.53,53.59 0 top
R229  1K  [0603-RES]  43.81,49.78 0 top
R230  10K  [0603-RES]  53.09,53.59 180 top
R231  10K  [0603-RES]  44.96,52.07 270 top
R232  .75  [0805]  91.31,56.26 90 top
R233  .75  [0805]  91.31,61.09 270 top
R234  20K  [0603-RES]  71.25,63.12 90 top
R235  20K  [0603-RES]  71.25,54.23 270 top
R236  2.49K  [0603-RES]  60.71,66.29 270 top
R237  390  [0603-RES]  58.17,52.32 180 top
R238  240  [0603-RES]  58.17,53.59 0 top
R239  1K  [0603-RES]  59.44,66.29 270 top
R240  10K  [0603-RES]  73.41,51.05 270 top
R241  10K  [0603-RES]  73.41,66.29 90 top
R242  10K  [0603-RES]  86.11,66.29 270 top
R243  10K  [0603-RES]  80.52,51.05 270 top
R244  10K  [0603-RES]  80.39,66.29 90 top
R245  10K  [0603-RES]  94.49,66.42 0 top
R246  330  [0603-RES]  58.17,51.05 180 top
R247  10K  [TRIMPOT-3MM-2]  66.04,57.15 0 top
R248  6.8K  [0603-RES]  69.22,63.12 90 top
R249  1K  [0603-RES]  98.3,53.59 0 top
R250  1K  [0603-RES]  92.58,49.78 0 top
R251  10K  [0603-RES]  101.85,53.59 180 top
R252  10K  [0603-RES]  93.73,52.07 270 top
R253  .75  [0805]  140.08,56.26 90 top
R254  .75  [0805]  140.08,61.09 270 top
R255  20K  [0603-RES]  120.02,63.12 90 top
R256  20K  [0603-RES]  120.02,54.23 270 top
R257  2.49K  [0603-RES]  109.47,66.29 270 top
R258  390  [0603-RES]  106.93,52.32 180 top
R259  240  [0603-RES]  106.93,53.59 0 top
R260  1K  [0603-RES]  108.2,66.29 270 top
R261  10K  [0603-RES]  122.17,51.05 270 top
R262  10K  [0603-RES]  122.17,66.29 90 top
R263  10K  [0603-RES]  134.87,66.29 270 top
R264  10K  [0603-RES]  129.29,51.05 270 top
R265  10K  [0603-RES]  129.16,66.29 90 top
R266  10K  [0603-RES]  143.26,66.42 0 top
R267  330  [0603-RES]  106.93,51.05 180 top
R268  10K  [TRIMPOT-3MM-2]  114.81,57.15 0 top
R269  6.8K  [0603-RES]  117.98,63.12 90 top
R270  1K  [0603-RES]  147.07,53.59 0 top
R271  1K  [0603-RES]  141.35,49.78 0 top
R272  10K  [0603-RES]  150.62,53.59 180 top
R273  10K  [0603-RES]  142.49,52.07 270 top
R274  .75  [0805]  188.85,56.26 90 top
R275  .75  [0805]  188.85,61.09 270 top
R276  20K  [0603-RES]  168.78,63.12 90 top
R277  20K  [0603-RES]  168.78,54.23 270 top
R278  2.49K  [0603-RES]  158.24,66.29 270 top
R279  390  [0603-RES]  155.7,52.32 180 top
R280  240  [0603-RES]  155.7,53.59 0 top
R281  1K  [0603-RES]  156.97,66.29 270 top
R282  10K  [0603-RES]  170.94,51.05 270 top
R283  10K  [0603-RES]  170.94,66.29 90 top
R284  10K  [0603-RES]  183.64,66.29 270 top
R285  10K  [0603-RES]  178.05,51.05 270 top
R286  10K  [0603-RES]  177.93,66.29 90 top
R287  10K  [0603-RES]  192.02,66.42 0 top
R288  330  [0603-RES]  155.7,51.05 180 top
R289  10K  [TRIMPOT-3MM-2]  163.58,57.15 0 top
R290  6.8K  [0603-RES]  166.75,63.12 90 top
R291  1K  [0603-RES]  195.83,53.59 0 top
R292  1K  [0603-RES]  190.12,49.78 0 top
R293  10K  [0603-RES]  199.39,53.59 180 top
R294  10K  [0603-RES]  191.26,52.07 270 top
R295  .75  [0805]  237.62,56.26 90 top
R296  .75  [0805]  237.62,61.09 270 top
R297  20K  [0603-RES]  217.55,63.12 90 top
R298  20K  [0603-RES]  217.55,54.23 270 top
R299  2.49K  [0603-RES]  207.01,66.29 270 top
R300  390  [0603-RES]  204.47,52.32 180 top
R301  240  [0603-RES]  204.47,53.59 0 top
R302  1K  [0603-RES]  205.74,66.29 270 top
R303  10K  [0603-RES]  219.71,51.05 270 top
R304  10K  [0603-RES]  219.71,66.29 90 top
R305  10K  [0603-RES]  232.41,66.29 270 top
R306  10K  [0603-RES]  226.82,51.05 270 top
R307  10K  [0603-RES]  226.69,66.29 90 top
R308  10K  [0603-RES]  240.79,66.42 0 top
R309  330  [0603-RES]  204.47,51.05 180 top
R310  10K  [TRIMPOT-3MM-2]  212.34,57.15 0 top
R311  6.8K  [0603-RES]  215.52,63.12 90 top
R312  1K  [0603-RES]  244.6,53.59 0 top
R313  1K  [0603-RES]  238.89,49.78 0 top
R314  10K  [0603-RES]  248.16,53.59 180 top
R315  10K  [0603-RES]  240.03,52.07 270 top
R316  .75  [0805]  42.55,77.09 90 top
R317  .75  [0805]  42.55,81.92 270 top
R318  20K  [0603-RES]  22.48,83.95 90 top
R319  20K  [0603-RES]  22.48,75.06 270 top
R320  2.49K  [0603-RES]  11.94,87.12 270 top
R321  390  [0603-RES]  9.4,73.15 180 top
R322  240  [0603-RES]  9.4,74.42 0 top
R323  1K  [0603-RES]  10.67,87.12 270 top
R324  10K  [0603-RES]  24.64,71.88 270 top
R325  10K  [0603-RES]  24.64,87.12 90 top
R326  10K  [0603-RES]  37.34,87.12 270 top
R327  10K  [0603-RES]  31.75,71.88 270 top
R328  10K  [0603-RES]  31.62,87.12 90 top
R329  10K  [0603-RES]  45.72,87.25 0 top
R330  330  [0603-RES]  9.4,71.88 180 top
R331  10K  [TRIMPOT-3MM-2]  17.27,77.98 0 top
R332  6.8K  [0603-RES]  20.45,83.95 90 top
R333  1K  [0603-RES]  49.53,74.42 0 top
R334  1K  [0603-RES]  43.81,70.61 0 top
R335  10K  [0603-RES]  53.09,74.42 180 top
R336  10K  [0603-RES]  44.96,72.9 270 top
R337  .75  [0805]  91.31,77.09 90 top
R338  .75  [0805]  91.31,81.92 270 top
R339  20K  [0603-RES]  71.25,83.95 90 top
R340  20K  [0603-RES]  71.25,75.06 270 top
R341  2.49K  [0603-RES]  60.71,87.12 270 top
R342  390  [0603-RES]  58.17,73.15 180 top
R343  240  [0603-RES]  58.17,74.42 0 top
R344  1K  [0603-RES]  59.44,87.12 270 top
R345  10K  [0603-RES]  73.41,71.88 270 top
R346  10K  [0603-RES]  73.41,87.12 90 top
R347  10K  [0603-RES]  86.11,87.12 270 top
R348  10K  [0603-RES]  80.52,71.88 270 top
R349  10K  [0603-RES]  80.39,87.12 90 top
R350  10K  [0603-RES]  94.49,87.25 0 top
R351  330  [0603-RES]  58.17,71.88 180 top
R352  10K  [TRIMPOT-3MM-2]  66.04,77.98 0 top
R353  6.8K  [0603-RES]  69.22,83.95 90 top
R354  1K  [0603-RES]  98.3,74.42 0 top
R355  1K  [0603-RES]  92.58,70.61 0 top
R356  10K  [0603-RES]  101.85,74.42 180 top
R357  10K  [0603-RES]  93.73,72.9 270 top
R358  .75  [0805]  140.08,77.09 90 top
R359  .75  [0805]  140.08,81.92 270 top
R360  20K  [0603-RES]  120.02,83.95 90 top
R361  20K  [0603-RES]  120.02,75.06 270 top
R362  2.49K  [0603-RES]  109.47,87.12 270 top
R363  390  [0603-RES]  106.93,73.15 180 top
R364  240  [0603-RES]  106.93,74.42 0 top
R365  1K  [0603-RES]  108.2,87.12 270 top
R366  10K  [0603-RES]  122.17,71.88 270 top
R367  10K  [0603-RES]  122.17,87.12 90 top
R368  10K  [0603-RES]  134.87,87.12 270 top
R369  10K  [0603-RES]  129.29,71.88 270 top
R370  10K  [0603-RES]  129.16,87.12 90 top
R371  10K  [0603-RES]  143.26,87.25 0 top
R372  330  [0603-RES]  106.93,71.88 180 top
R373  10K  [TRIMPOT-3MM-2]  114.81,77.98 0 top
R374  6.8K  [0603-RES]  117.98,83.95 90 top
R375  1K  [0603-RES]  147.07,74.42 0 top
R376  1K  [0603-RES]  141.35,70.61 0 top
R377  10K  [0603-RES]  150.62,74.42 180 top
R378  10K  [0603-RES]  142.49,72.9 270 top
R379  .75  [0805]  188.85,77.09 90 top
R380  .75  [0805]  188.85,81.92 270 top
R381  20K  [0603-RES]  168.78,83.95 90 top
R382  20K  [0603-RES]  168.78,75.06 270 top
R383  2.49K  [0603-RES]  158.24,87.12 270 top
R384  390  [0603-RES]  155.7,73.15 180 top
R385  240  [0603-RES]  155.7,74.42 0 top
R386  1K  [0603-RES]  156.97,87.12 270 top
R387  10K  [0603-RES]  170.94,71.88 270 top
R388  10K  [0603-RES]  170.94,87.12 90 top
R389  10K  [0603-RES]  183.64,87.12 270 top
R390  10K  [0603-RES]  178.05,71.88 270 top
R391  10K  [0603-RES]  177.93,87.12 90 top
R392  10K  [0603-RES]  192.02,87.25 0 top
R393  330  [0603-RES]  155.7,71.88 180 top
R394  10K  [TRIMPOT-3MM-2]  163.58,77.98 0 top
R395  6.8K  [0603-RES]  166.75,83.95 90 top
R396  1K  [0603-RES]  195.83,74.42 0 top
R397  1K  [0603-RES]  190.12,70.61 0 top
R398  10K  [0603-RES]  199.39,74.42 180 top
R399  10K  [0603-RES]  191.26,72.9 270 top
R400  .75  [0805]  237.62,77.09 90 top
R401  .75  [0805]  237.62,81.92 270 top
R402  20K  [0603-RES]  217.55,83.95 90 top
R403  20K  [0603-RES]  217.55,75.06 270 top
R404  2.49K  [0603-RES]  207.01,87.12 270 top
R405  390  [0603-RES]  204.47,73.15 180 top
R406  240  [0603-RES]  204.47,74.42 0 top
R407  1K  [0603-RES]  205.74,87.12 270 top
R408  10K  [0603-RES]  219.71,71.88 270 top
R409  10K  [0603-RES]  219.71,87.12 90 top
R410  10K  [0603-RES]  232.41,87.12 270 top
R411  10K  [0603-RES]  226.82,71.88 270 top
R412  10K  [0603-RES]  226.69,87.12 90 top
R413  10K  [0603-RES]  240.79,87.25 0 top
R414  330  [0603-RES]  204.47,71.88 180 top
R415  10K  [TRIMPOT-3MM-2]  212.34,77.98 0 top
R416  6.8K  [0603-RES]  215.52,83.95 90 top
R417  1K  [0603-RES]  244.6,74.42 0 top
R418  1K  [0603-RES]  238.89,70.61 0 top
R419  10K  [0603-RES]  248.16,74.42 180 top
R420  10K  [0603-RES]  240.03,72.9 270 top
R421  .75  [0805]  42.55,97.92 90 top
R422  .75  [0805]  42.55,102.74 270 top
R423  20K  [0603-RES]  22.48,104.78 90 top
R424  20K  [0603-RES]  22.48,95.89 270 top
R425  2.49K  [0603-RES]  11.94,107.95 270 top
R426  390  [0603-RES]  9.4,93.98 180 top
R427  240  [0603-RES]  9.4,95.25 0 top
R428  1K  [0603-RES]  10.67,107.95 270 top
R429  10K  [0603-RES]  24.64,92.71 270 top
R430  10K  [0603-RES]  24.64,107.95 90 top
R431  10K  [0603-RES]  37.34,107.95 270 top
R432  10K  [0603-RES]  31.75,92.71 270 top
R433  10K  [0603-RES]  31.62,107.95 90 top
R434  10K  [0603-RES]  45.72,108.08 0 top
R435  330  [0603-RES]  9.4,92.71 180 top
R436  10K  [TRIMPOT-3MM-2]  17.27,98.81 0 top
R437  6.8K  [0603-RES]  20.45,104.78 90 top
R438  1K  [0603-RES]  49.53,95.25 0 top
R439  1K  [0603-RES]  43.81,91.44 0 top
R440  10K  [0603-RES]  53.09,95.25 180 top
R441  10K  [0603-RES]  44.96,93.73 270 top
R442  .75  [0805]  91.31,97.92 90 top
R443  .75  [0805]  91.31,102.74 270 top
R444  20K  [0603-RES]  71.25,104.78 90 top
R445  20K  [0603-RES]  71.25,95.89 270 top
R446  2.49K  [0603-RES]  60.71,107.95 270 top
R447  390  [0603-RES]  58.17,93.98 180 top
R448  240  [0603-RES]  58.17,95.25 0 top
R449  1K  [0603-RES]  59.44,107.95 270 top
R450  10K  [0603-RES]  73.41,92.71 270 top
R451  10K  [0603-RES]  73.41,107.95 90 top
R452  10K  [0603-RES]  86.11,107.95 270 top
R453  10K  [0603-RES]  80.52,92.71 270 top
R454  10K  [0603-RES]  80.39,107.95 90 top
R455  10K  [0603-RES]  94.49,108.08 0 top
R456  330  [0603-RES]  58.17,92.71 180 top
R457  10K  [TRIMPOT-3MM-2]  66.04,98.81 0 top
R458  6.8K  [0603-RES]  69.22,104.78 90 top
R459  1K  [0603-RES]  98.3,95.25 0 top
R460  1K  [0603-RES]  92.58,91.44 0 top
R461  10K  [0603-RES]  101.85,95.25 180 top
R462  10K  [0603-RES]  93.73,93.73 270 top
R463  .75  [0805]  140.08,97.92 90 top
R464  .75  [0805]  140.08,102.74 270 top
R465  20K  [0603-RES]  120.02,104.78 90 top
R466  20K  [0603-RES]  120.02,95.89 270 top